# Altium PCB mchf_pro_ui.PcbDoc (part 1 of 6)
Units mm, origin at the board's own origin, x right, y up, seen from the top; angles counter-clockwise.
Board outline 200.09 x 143.79 mm, 2 copper layers (Top Layer, Bottom Layer); 329 components, 335 nets, 1276 pads, 515 vias.
Unrouted connection lines stored in the file: 91.
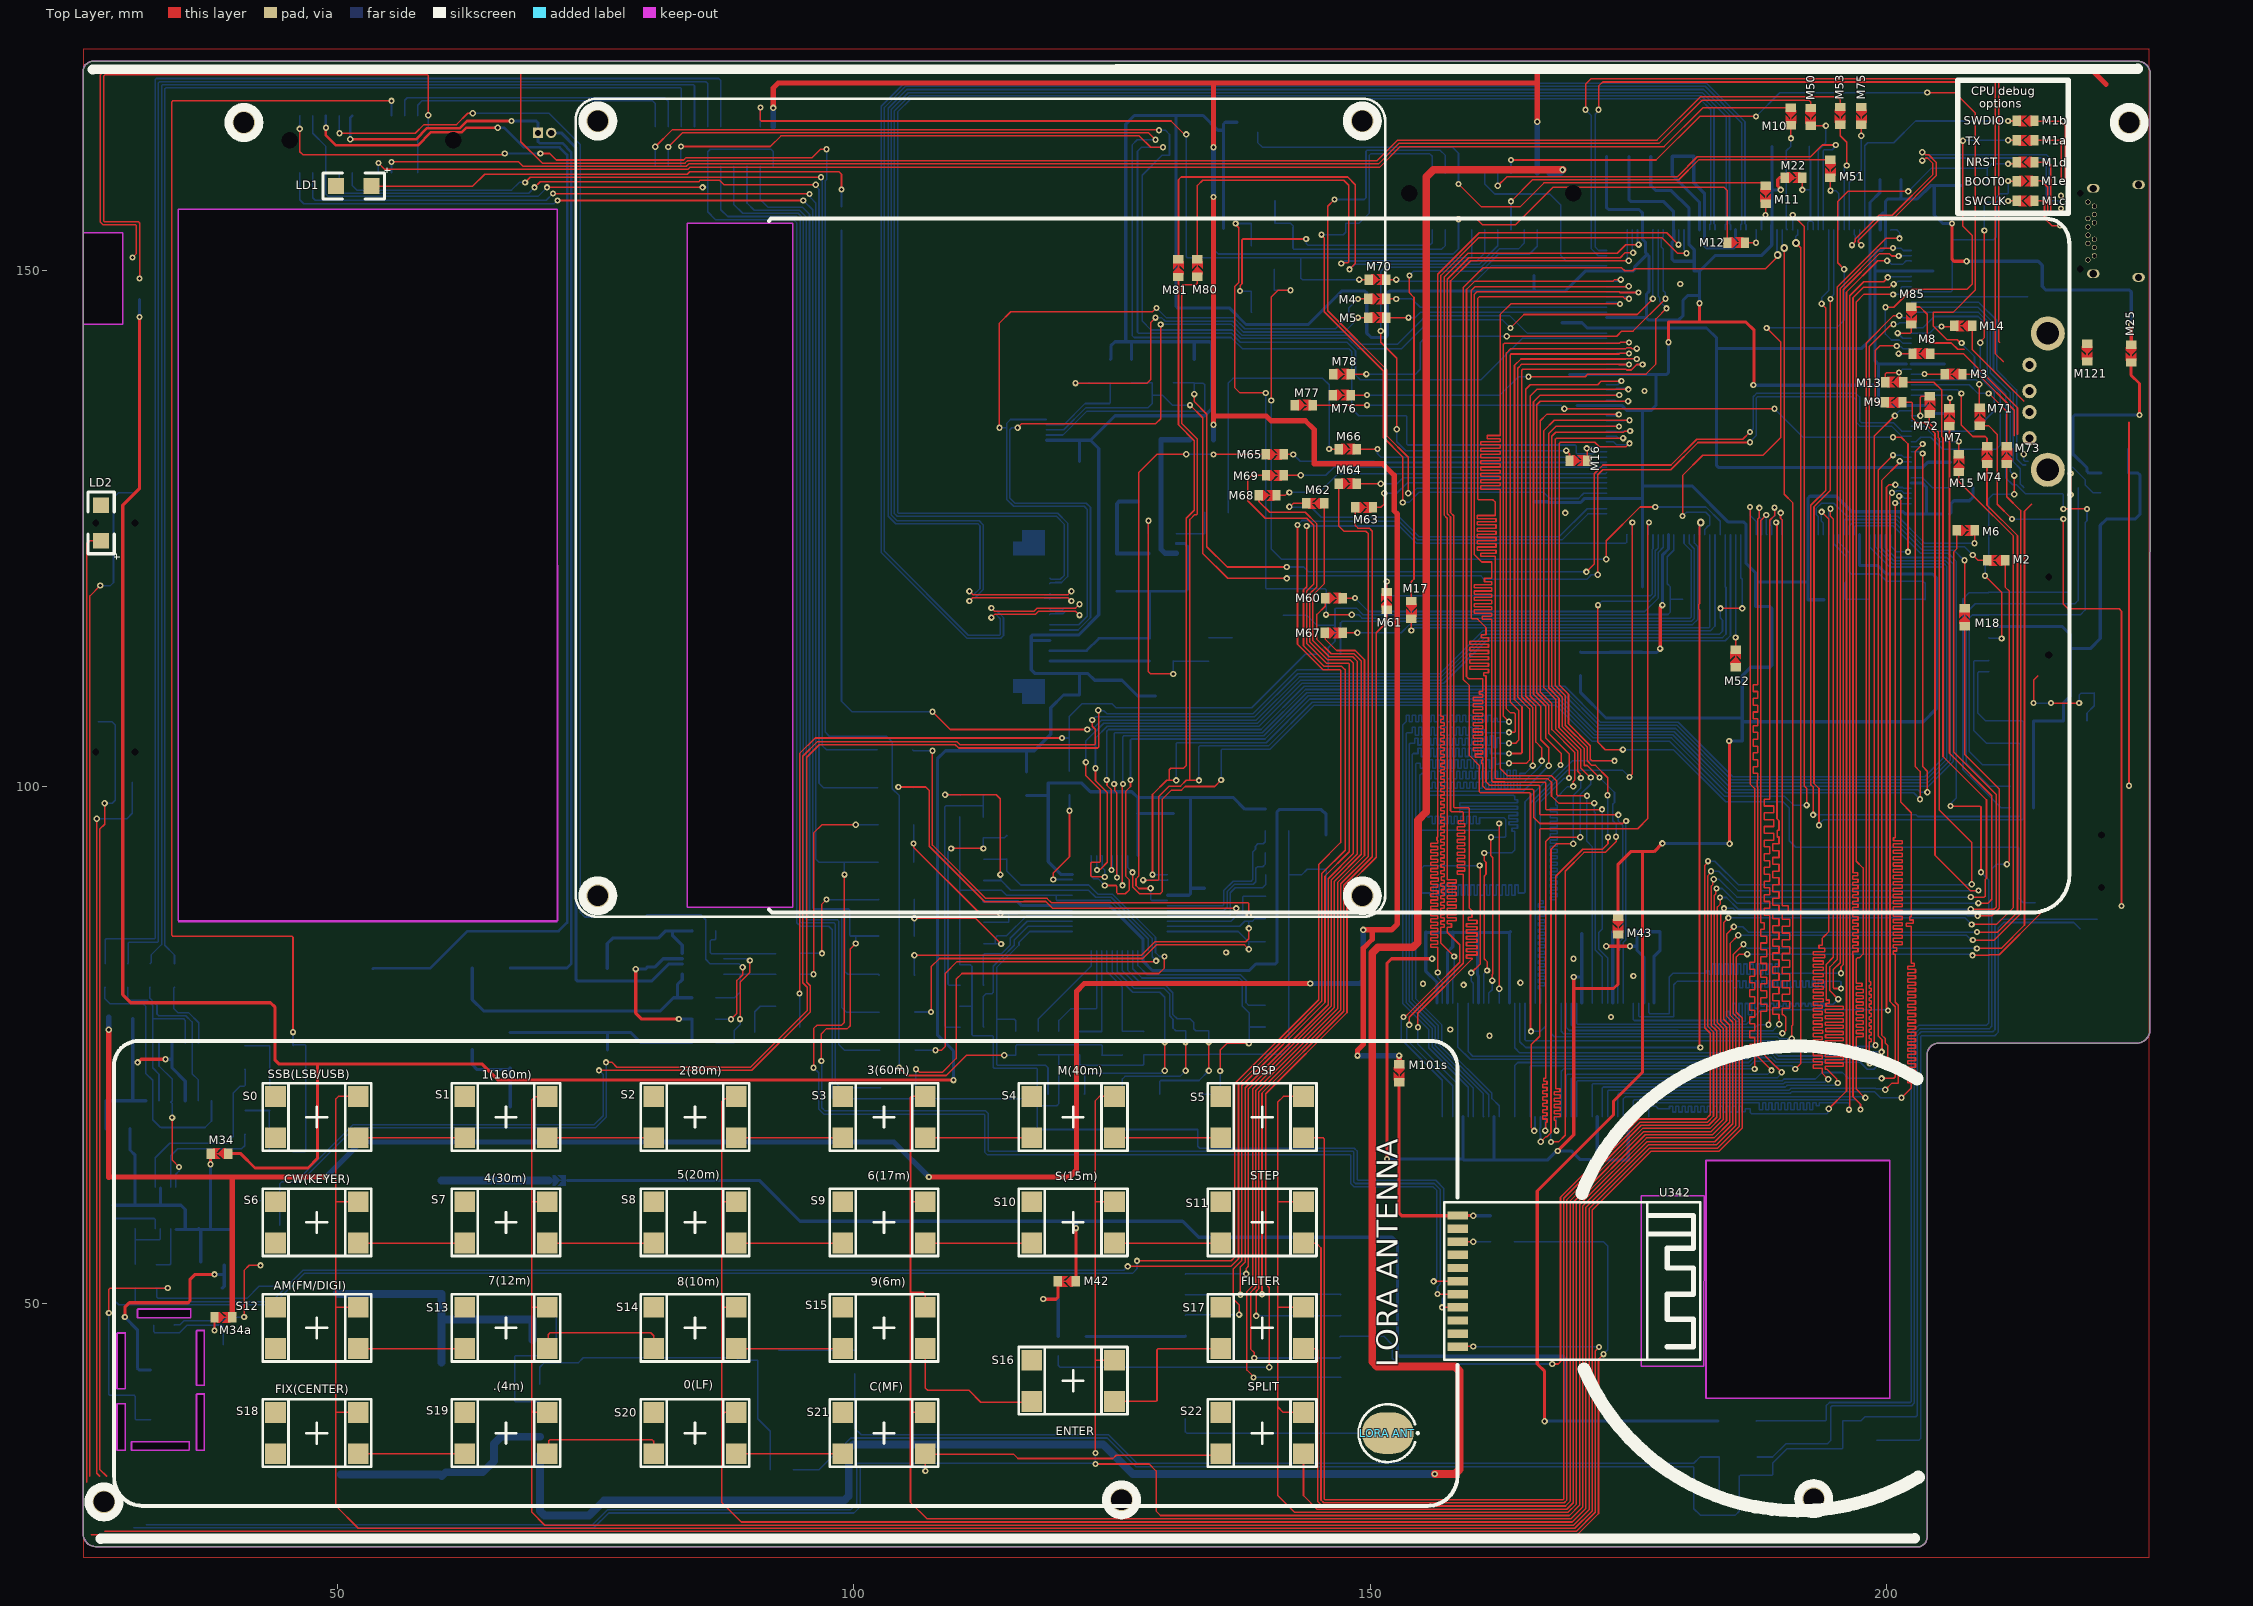
[diagram p0: Top Layer view]
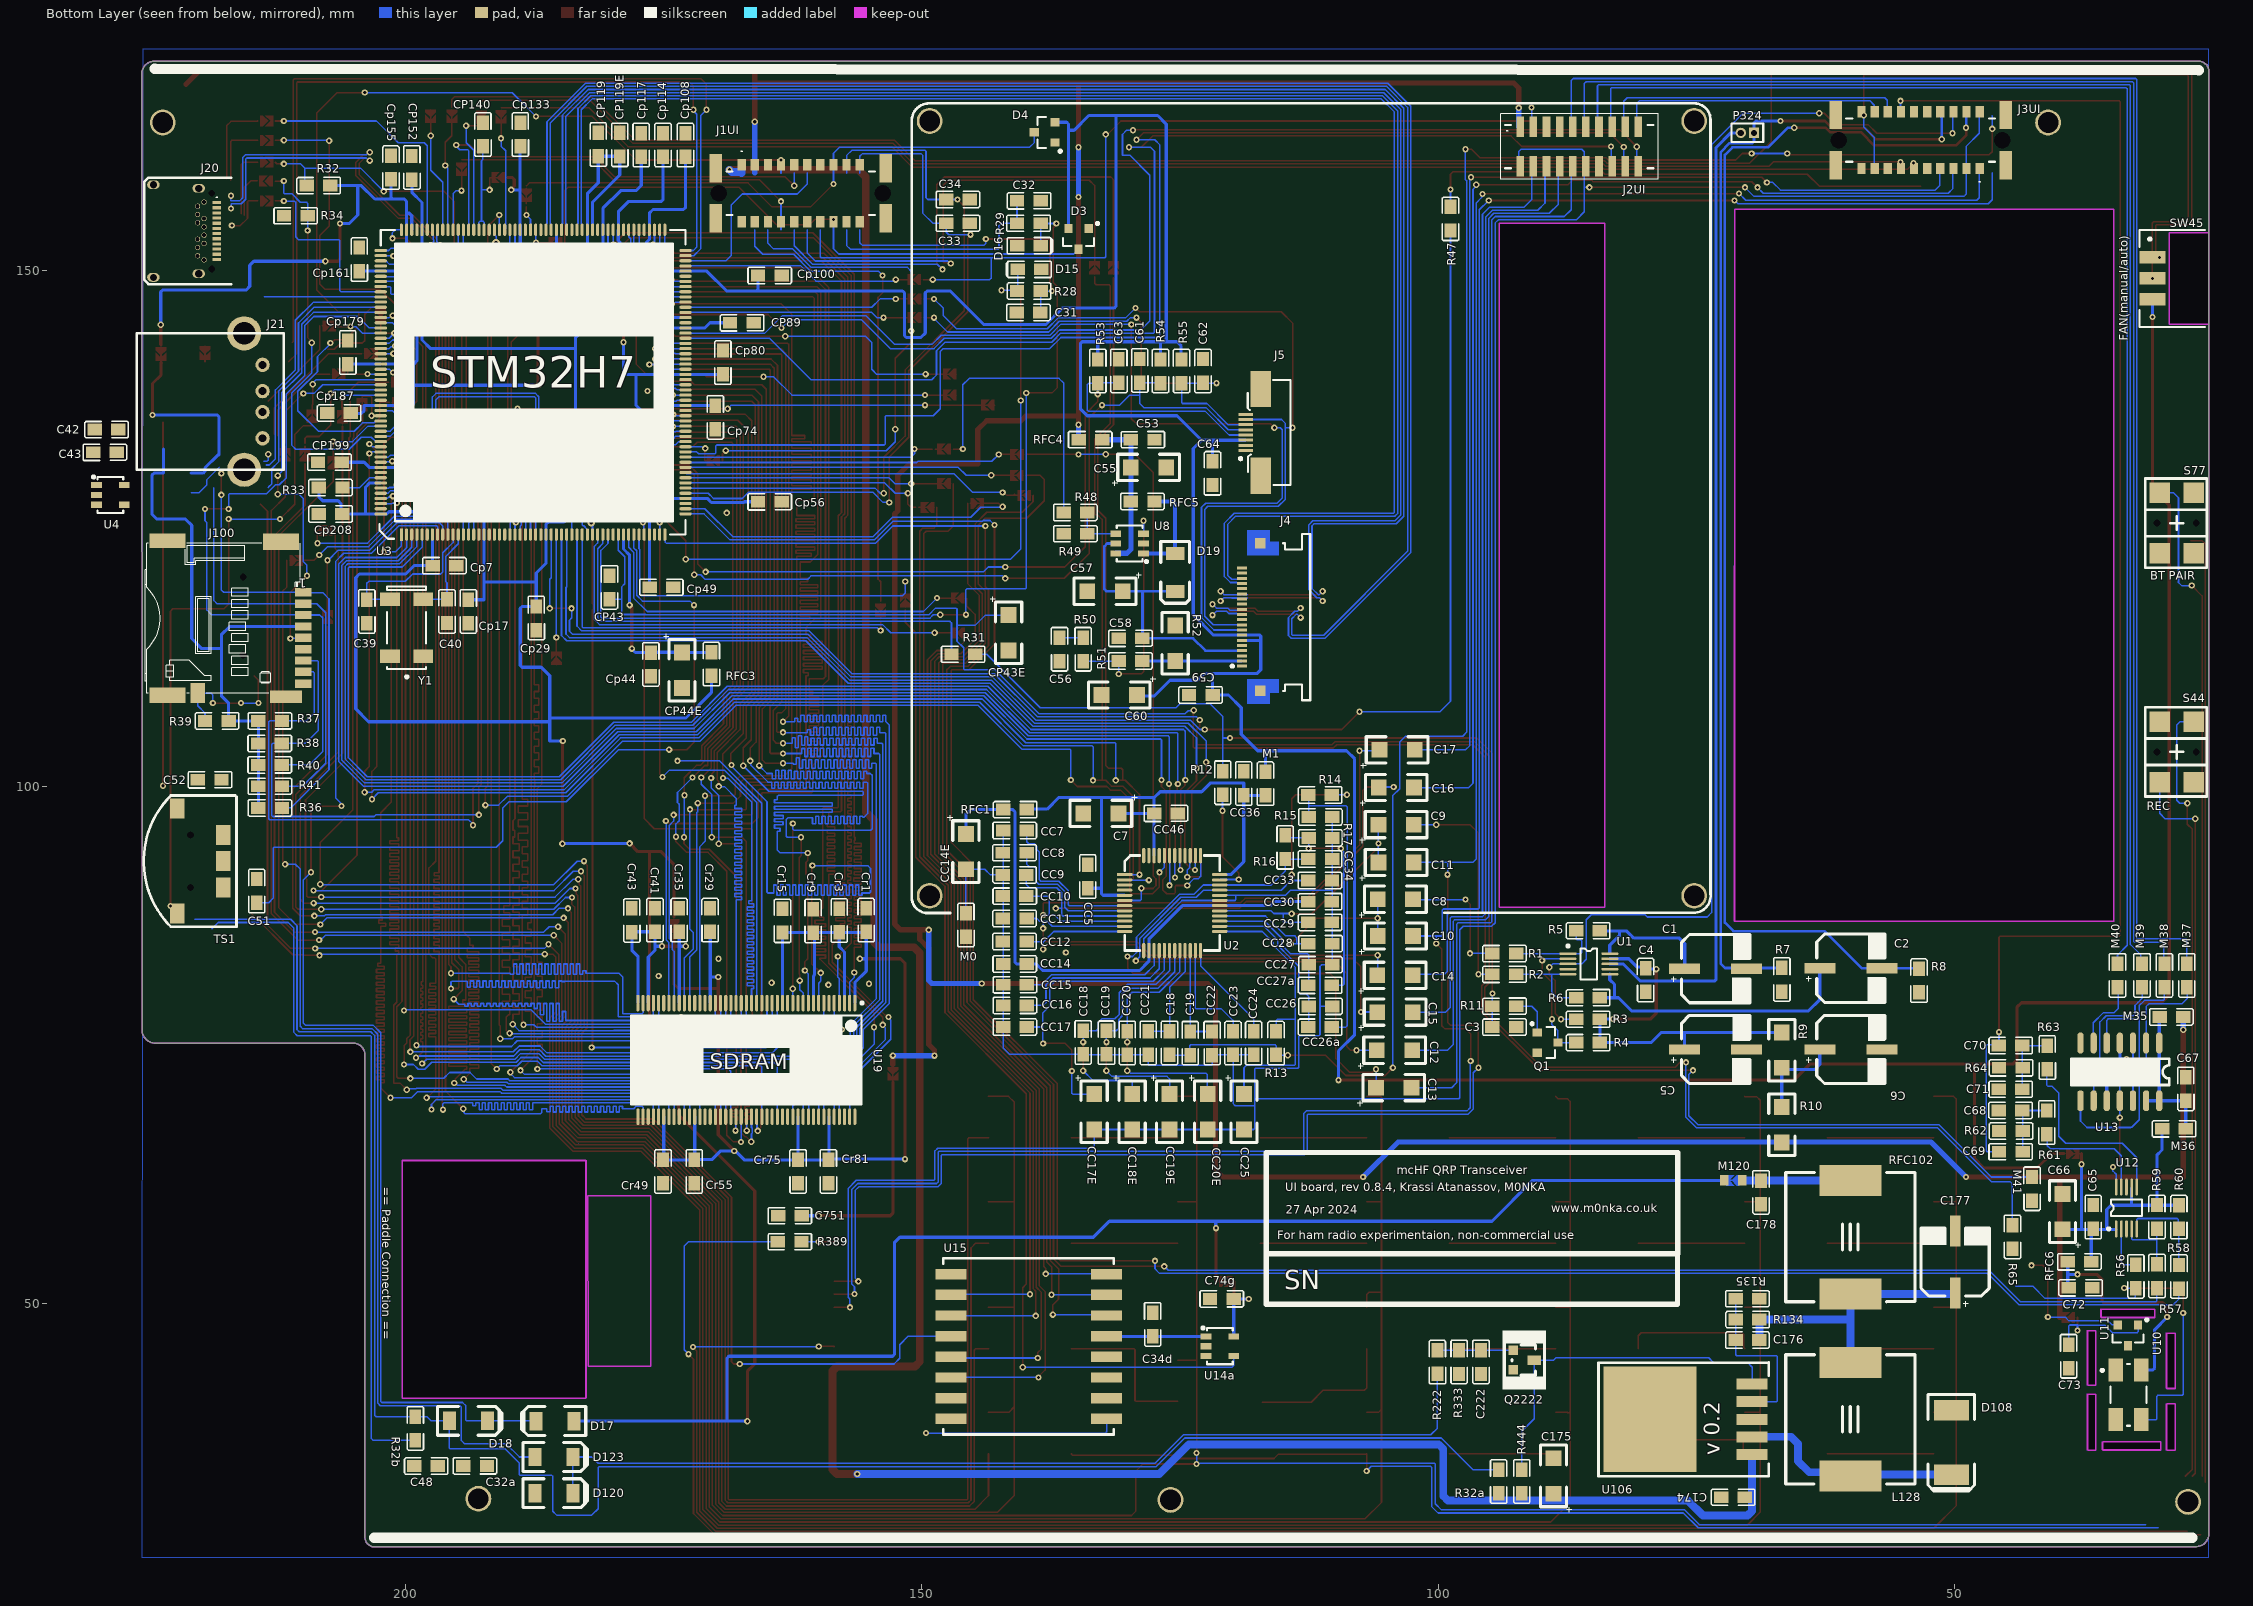
[diagram p1: Bottom Layer view, seen from below]

## Layer stack, top to bottom
Top Solder: solder mask 0.0102, Solder Resist, Dk 3.5
Top Layer: signal copper 0.0356
Dielectric 1: dielectric 0.32, FR-4, Dk 4.8
Bottom Layer: signal copper 0.0356
Bottom Solder: solder mask 0.0102, Solder Resist, Dk 3.5

## Board outline
26.612,26.451 cw(c26.608,27.659) 25.4,27.659 25.387,169.226 cw(c26.383,169.234) 26.375,170.23 224.239,170.23 224.234,170.242 cw(c224.239,168.999) 225.481,169.009 225.476,168.989 225.458,76.483 225.458,76.516 cw(c224.15,76.483) 224.182,75.175 224.15,75.175 204.979,75.175 205,75.175 ccw(c204.979,74.096) 203.9,74.118 203.9,74.096 203.9,27.35 203.89,27.35 cw(c202.9,27.396) 203.199,26.451
cut-out: 28.688,35.779 29.503,35.779 29.503,40.288 28.688,40.288
cut-out: 28.688,41.761 29.503,41.761 29.503,47.144 28.688,47.144
cut-out: 37.181,41.237 36.366,41.237 36.366,35.79 37.181,35.79
cut-out: 37.181,47.375 36.366,47.375 36.366,42.07 37.181,42.07
cut-out: 30.11,36.619 30.11,35.804 35.724,35.804 35.724,36.619
cut-out: 30.694,49.472 30.694,48.643 35.872,48.643 35.872,49.472
cut-out: 71.303,86.957 71.303,155.918 34.607,155.918 34.607,86.957
cut-out: 94.074,154.557 83.888,154.557 83.888,88.34 94.074,88.34
cut-out: 200.258,63.827 182.472,63.827 182.472,40.833 200.258,40.833

## Design rules (kind name [scope] priority, off if disabled: settings)
Clearance Clearance_2 [InComponent('U204')] p1: gap=0.127 ignorepadtopadclearanceinfootprint=FALSE except(0: Arc-Hole Track-Hole SMDPad-Hole THPad-Hole Via-Hole Fill-Hole Poly-Hole Region-Hole Text-Hole)
Clearance [All] p2: gap=0.152 ignorepadtopadclearanceinfootprint=FALSE except(0: Arc-Hole Track-Hole SMDPad-Hole THPad-Hole Via-Hole Fill-Hole Poly-Hole Region-Hole Text-Hole)
DiffPairsRouting [All] p1: maxlimit=0.61 minlimit=0.152 mostfreqgap=0.152 toplayer_minwidth=0.152 toplayer_maxwidth=0.152 toplayer_prefwidth=0.152 bottomlayer_minwidth=0.152 bottomlayer_maxwidth=0.152 bottomlayer_prefwidth=0.152 maxuncoupledlength=12.7
HoleSize [All] p1: absolutevalues=TRUE maxlimit=152.4 minlimit=0.3 maxpercent=80.000 minpercent=20.000
MatchedLengths "Schematic Matched Net Lengths_4" [InNet('OTG_HS_DP')] p1: tolerance=7.62 checknetsindiffpair=TRUE checkdiffpairvsdiffpair=FALSE checkxsignals=FALSE checkothers=FALSE
MatchedLengths "Schematic Matched Net Lengths" [InNet('OTG_HS_DM')] p2: tolerance=7.62 checknetsindiffpair=TRUE checkdiffpairvsdiffpair=FALSE checkxsignals=FALSE checkothers=FALSE
MatchedLengths "Schematic Matched Net Lengths_12" [InNetClass('FMC_D[0..31]')] p3: tolerance=2.54 checknetsindiffpair=FALSE checkdiffpairvsdiffpair=TRUE checkxsignals=TRUE checkothers=TRUE
MatchedLengths "Schematic Matched Net Lengths_3" [InNetClass('FMC_A[0..11]')] p4: tolerance=2.54 checknetsindiffpair=FALSE checkdiffpairvsdiffpair=TRUE checkxsignals=TRUE checkothers=TRUE
MatchedLengths "Schematic Matched Net Lengths_2" [InNet('USB_DFU_N')] p5: tolerance=7.62 checknetsindiffpair=TRUE checkdiffpairvsdiffpair=FALSE checkxsignals=FALSE checkothers=FALSE
MatchedLengths "Schematic Matched Net Lengths_1" [InNet('USB_DFU_P')] p6: tolerance=7.62 checknetsindiffpair=TRUE checkdiffpairvsdiffpair=FALSE checkxsignals=FALSE checkothers=FALSE
PolygonConnect PolygonConnect_4 [InComponent('C1') or InComponent('C2') or InComponent('C5')  or InComponent('C6')] p1: connectstyle=Relief reliefconductorwidth=0.508 reliefentries=4 polygonreliefangle="45 Angle" airgapwidth=0.254
PolygonConnect PolygonConnect_1 [IsVia] p2: connectstyle=Direct reliefconductorwidth=0.254 reliefentries=4 polygonreliefangle="90 Angle" airgapwidth=0.254
PolygonConnect [All] p3: connectstyle=Relief reliefconductorwidth=0.254 reliefentries=4 polygonreliefangle="90 Angle" airgapwidth=0.254
RoomDefinition "BT Audio Module" [InComponentClass('BT Audio Module')] p1: confinementstyle=ConfineIn formatcopy=TRUE lockcomponents=FALSE outline 226.586,27.851 253.287,27.851 253.287,35.052 226.586,35.052
RoomDefinition "Speaker Amp" [InComponentClass('Speaker Amp')] p2: confinementstyle=ConfineOut formatcopy=TRUE lockcomponents=FALSE outline 185.75,199.525 224.525,199.525 224.525,207.275 185.75,207.275
RoomDefinition Codec [InComponentClass('Codec')] p3: confinementstyle=ConfineIn formatcopy=TRUE lockcomponents=FALSE outline 148.676,61.211 148.676,105.905 99.578,105.905 99.578,61.211
RoomDefinition "Debug Port" [InComponentClass('Debug Port')] p4: confinementstyle=ConfineIn formatcopy=TRUE lockcomponents=FALSE outline 225.473,168.75 205.536,168.75 205.536,117.274 225.473,117.274
RoomDefinition "LORA wireless module" [InComponentClass('LORA wireless module')] p5: confinementstyle=ConfineOut formatcopy=TRUE lockcomponents=FALSE outline 156.375,199.55 185.225,199.55 185.225,207.25 156.375,207.25
RoomDefinition "LCD interface" [InComponentClass('LCD interface')] p6: confinementstyle=ConfineIn formatcopy=TRUE lockcomponents=FALSE outline 99.65,106.275 146.6,106.275 146.6,168.181 99.65,168.181
RoomDefinition "Local Oscillator" [InComponentClass('Local Oscillator')] p7: confinementstyle=ConfineIn formatcopy=TRUE lockcomponents=FALSE outline 50.425,86.6 26.679,86.6 26.679,34.35 50.425,34.35
RoomDefinition SDRAM [InComponentClass('SDRAM')] p8: confinementstyle=ConfineIn formatcopy=TRUE lockcomponents=FALSE outline 149.45,92.84 149.45,59.95 181.924,59.95 181.924,92.84
RoomDefinition CPU [InComponentClass('CPU')] p9: confinementstyle=ConfineOut formatcopy=TRUE lockcomponents=FALSE outline 156.235,173.431 165.532,173.431 165.532,199.034 156.235,199.034
RoomDefinition "RF/Audio board Interface" [InComponentClass('RF/Audio board Interface')] p10: confinementstyle=ConfineOut formatcopy=TRUE lockcomponents=FALSE outline 192.748,173.575 211.218,173.575 211.218,189.775 192.748,189.775
RoomDefinition "UI Controls" [InComponentClass('UI Controls')] p11: confinementstyle=ConfineOut formatcopy=TRUE lockcomponents=FALSE outline 166.014,173.431 192.532,173.431 192.532,189.916 166.014,189.916
RoomDefinition "CPU power and clocks" [InComponentClass('CPU power and clocks')] p12: confinementstyle=ConfineOut formatcopy=TRUE lockcomponents=FALSE outline 166.014,190.373 224.536,190.373 224.536,198.933 166.014,198.933
RoutingVias [All] p1: holewidth=0.381 width=0.762 viastyle="Through Hole" minholewidth=0.711 minwidth=1.27 maxholewidth=0.711 maxwidth=1.27
SilkToSilkClearance [All] p1: silktosilkclearance=0.127
SilkToSolderMaskClearance SilkscreenOverComponentPads [IsPad] p1: minsilkscreentomaskgap=0 clearancetoexposedcopper=TRUE
SolderMaskExpansion SolderMaskExpansion_1 [IsVia] p1: expansion=-0.381 istentingtop=FALSE
SolderMaskExpansion [All] p2: expansion=0.102 istentingtop=FALSE
Width "Schematic Width Constraint_19" [InNet('NetCP89_2')] p1: maxlimit=0.305 minlimit=0.305 preferedwidth=0.305
Width "Schematic Width Constraint_7" [InNet('UI_3V_MCU')] p2: maxlimit=0.305 minlimit=0.305 preferedwidth=0.305
Width "Schematic Width Constraint_11" [InNet('VCC_5V_RF')] p3: maxlimit=0.508 minlimit=0.508 preferedwidth=0.508
Width "Schematic Width Constraint_5" [InNet('NetC751_2')] p4: maxlimit=0.305 minlimit=0.305 preferedwidth=0.305
Width "Schematic Width Constraint_2" [InNet('NetC74g_2')] p5: maxlimit=0.305 minlimit=0.305 preferedwidth=0.305
Width "Schematic Width Constraint_36" [InNet('NetP324_2')] p6: maxlimit=0.305 minlimit=0.305 preferedwidth=0.305
Width "Schematic Width Constraint_35" [InNet('NetC1_1')] p7: maxlimit=0.305 minlimit=0.305 preferedwidth=0.305
Width "Schematic Width Constraint_34" [InNet('NetC4_2')] p8: maxlimit=0.305 minlimit=0.305 preferedwidth=0.305
Width "Schematic Width Constraint_33" [InNet('NetC2_1')] p9: maxlimit=0.305 minlimit=0.305 preferedwidth=0.305
Width "Schematic Width Constraint_32" [InNet('NetC6_1')] p10: maxlimit=0.305 minlimit=0.305 preferedwidth=0.305
Width "Schematic Width Constraint_31" [InNet('PHONES_R')] p11: maxlimit=0.254 minlimit=0.254 preferedwidth=0.254
Width "Schematic Width Constraint_20" [InNet('PHONES_L')] p12: maxlimit=0.254 minlimit=0.254 preferedwidth=0.254
Width "Schematic Width Constraint_14" [InNet('NetD108_2')] p13: maxlimit=0.762 minlimit=0.762 preferedwidth=0.762
Width "Schematic Width Constraint_8" [InNet('VCC_20V')] p14: maxlimit=0.762 minlimit=0.762 preferedwidth=0.762
Width "Schematic Width Constraint_6" [InNet('NetC176_2')] p15: maxlimit=0.762 minlimit=0.762 preferedwidth=0.762
Width "Schematic Width Constraint_4" [InNet('NetC178_1')] p16: maxlimit=0.762 minlimit=0.762 preferedwidth=0.762
Width "Schematic Width Constraint_46" [InNet('NetC42_2')] p17: maxlimit=0.305 minlimit=0.305 preferedwidth=0.305
Width "Schematic Width Constraint_37" [InNet('NetC34d_2')] p18: maxlimit=0.305 minlimit=0.305 preferedwidth=0.305
Width "Schematic Width Constraint_30" [InNet('UI_3V_LO')] p19: maxlimit=0.305 minlimit=0.305 preferedwidth=0.305
Width "Schematic Width Constraint_27" [InNet('NetC67_2')] p20: maxlimit=0.305 minlimit=0.305 preferedwidth=0.305
Width "Schematic Width Constraint_23" [InNet('NetCC14_2')] p21: maxlimit=0.305 minlimit=0.305 preferedwidth=0.305
Width "Schematic Width Constraint_21" [InNet('VDDA')] p22: maxlimit=0.305 minlimit=0.305 preferedwidth=0.305
Width "Schematic Width Constraint_17" [InNet('UI_3V_SDRAM')] p23: maxlimit=0.305 minlimit=0.305 preferedwidth=0.305
Width "Schematic Width Constraint_15" [InNet('GND')] p24: maxlimit=0.508 minlimit=0.508 preferedwidth=0.508
Width "Schematic Width Constraint_3" [InNet('SD_POWER')] p25: maxlimit=0.305 minlimit=0.305 preferedwidth=0.305
Width "Schematic Width Constraint_1" [InNet('NetC7_1')] p26: maxlimit=0.305 minlimit=0.305 preferedwidth=0.305
Width "Schematic Width Constraint" [InNet('NetC72_2')] p27: maxlimit=0.305 minlimit=0.305 preferedwidth=0.305
Width "Schematic Width Constraint_18" [InNet('NetCP119_1')] p28: maxlimit=0.305 minlimit=0.305 preferedwidth=0.305
Width "Schematic Width Constraint_10" [InNet('LCD_BL_A')] p29: maxlimit=0.254 minlimit=0.254 preferedwidth=0.254
Width "Schematic Width Constraint_9" [InNet('LCD_BL_K')] p30: maxlimit=0.254 minlimit=0.254 preferedwidth=0.254
Width "Schematic Width Constraint_13" [InNet('NetD19_1')] p31: maxlimit=0.381 minlimit=0.381 preferedwidth=0.381
Width "Schematic Width Constraint_12" [InNet('LCD_VDD')] p32: maxlimit=0.508 minlimit=0.508 preferedwidth=0.508
Width [All] p33: maxlimit=0.152 minlimit=0.152 preferedwidth=0.152
26 further rules are at their usual default settings.

## Classes and differential pairs
component class "BT Audio Module": C751 LD2 M101s R389 U342
component class "Speaker Amp": C1 C2 C3 C4 C5 C6 J3UI P324 Q1 R1 R2 R3 R4 R5 R6 R7 R8 R9 R10 R11 SW45 U1
component class "LORA wireless module": C34d C74g "Lora Ant" M42 U14a U15
component class "Debug Port": C42 C43 J20 J21 J100 M1a M1b M1c M1d M1e M25 M121 R36 R37 R38 R39 R40 R41 U4
component class Codec: C7 C8 C9 C10 C11 C12 C13 C14 C15 C16 C17 C18 C19 CC5 CC7 CC8 CC9 CC10 CC11 CC12 CC14 CC14E CC15 CC16 CC17 CC17E CC18 CC18E CC19 CC19E CC20 CC20E CC21 CC22 CC23 CC24 CC25 CC26 CC26a CC27 CC27a CC28 CC29 CC30 CC33 CC34 CC36 CC46 M0 M1 R12 R13 R14 R15 R16 R17 RFC1 U2
component class "Local Oscillator": C65 C66 C67 C68 C69 C70 C71 C72 C73 J2UI M34 M34a M35 M36 M37 M38 M39 M40 M41 R56 R57 R58 R59 R60 R61 R62 R63 R64 R65 RFC6 U10 U11 U12 U13
component class "CPU Power and Clocks": C32a C39 C40 C174 C175 C176 C177 C178 C222 Cp7 Cp17 Cp29 CP43 CP43E Cp44 CP44E Cp49 Cp56 Cp74 Cp80 CP89 Cp100 Cp108 Cp114 Cp117 CP119 CP119E Cp133 CP140 CP152 Cp155 Cp161 Cp179 Cp187 CP199 Cp208 D17 D18 D108 D120 D123 L128 M22 M120 Q2222 R32 R32a R32b R33 R34 R134 R135 R222 R333 R444 RFC3 RFC102 U106 Y1
net class FMC_D[0..31]: FMC_D0 FMC_D1 FMC_D2 FMC_D3 FMC_D4 FMC_D5 FMC_D6 FMC_D7 FMC_D8 FMC_D9 FMC_D10 FMC_D11 FMC_D12 FMC_D13 FMC_D14 FMC_D15 FMC_D16 FMC_D17 FMC_D18 FMC_D19 FMC_D20 FMC_D21 FMC_D22 FMC_D23 FMC_D24 FMC_D25 FMC_D26 FMC_D27 FMC_D28 FMC_D29 FMC_D30 FMC_D31
net class FMC_A[0..11]: FMC_A0 FMC_A1 FMC_A2 FMC_A3 FMC_A4 FMC_A5 FMC_A6 FMC_A7 FMC_A8 FMC_A9 FMC_A10 FMC_A11
component class SDRAM: Cr1 Cr3 Cr9 Cr15 Cr29 Cr35 Cr41 Cr43 Cr49 Cr55 Cr75 Cr81 M43 U19
component class "RF/Audio board Interface": C31 C32 C33 C34 D3 D4 D15 D16 J1UI R28 R29
component class "UI Controls": C48 C51 C52 C252 C255 C258 C267 C268 C269 C270 C271 C272 LD1 R47 S0 S1 S2 S3 S4 S5 S6 S7 S8 S9 S10 S11 S12 S13 S14 S15 S16 S17 S18 S19 S20 S21 S22 S44 S77 TS1
component class CPU: M2 M3 M4 M5 M6 M7 M8 M9 M10 M11 M12 M13 M14 M15 M16 M17 M18 M50 M51 M52 M53 M60 M61 M62 M63 M64 M65 M66 M67 M68 M69 M70 M71 M72 M73 M74 M75 M76 M77 M78 M80 M81 M85 R31 R_15 U3
component class "LCD interface": C53 C55 C56 C57 C58 C59 C60 C61 C62 C63 C64 D19 J4 J5 L4 L5 R48 R49 R50 R51 R52 R53 R54 R55 RFC4 RFC5 U8
differential pair DSI_D1: +DSI_D1_P -DSI_D1_N
differential pair DSI_D0: +DSI_D0_P -DSI_D0_N
differential pair DSI_CLK: +DSI_CLK_P -DSI_CLK_N
differential pair USB_DFU: +USB_DFU_P -USB_DFU_N

## Components (designator, comment, footprint, x,y, rotation, side; value= is the part's Value field where it differs from the comment)
C1 "100uF" CAP_ALUM_Pro 73.125,82.4 r180 bottom locked
C2 "100uF" CAP_ALUM_Pro 60.05,82.433 r180 bottom locked
C3 "100nF" 0805 92.428,76.743 r0 bottom
C4 "100nF" 0805 79.9,80.125 r90 bottom
C5 "220uF" CAP_ALUM_Pro 73.129,74.575 r180 bottom locked
C6 "220uF" CAP_ALUM_Pro 60.05,74.575 r180 bottom locked
C7 "10uF" 1206_Elec_Cap 130.903,97.427 r0 bottom
C8 "1uF" 1206_Elec_Cap 105.871,89.111 r180 bottom
C9 "1uF" 1206_Elec_Cap 105.796,96.325 r180 bottom
C10 "1uF" 1206_Elec_Cap 105.871,85.552 r180 bottom
C11 "1uF" 1206_Elec_Cap 105.796,92.67 r180 bottom
C12 "1uF" 1206_Elec_Cap 105.951,74.494 r180 bottom
C13 "1uF" 1206_Elec_Cap 106.026,70.869 r180 bottom
C14 "1uF" 1206_Elec_Cap 105.902,81.744 r180 bottom
C15 "1uF" 1206_Elec_Cap 105.902,78.178 r180 bottom
C16 "1uF" 1206_Elec_Cap 105.776,99.919 r180 bottom
C17 "1uF" 1206_Elec_Cap 105.701,103.569 r180 bottom
C18 "2.2uF" 0805 125.998,76.356 r270 bottom value=100nF
C19 "2.2uF" 0805 123.998,76.332 r270 bottom value=100nF
C31 "100nF" 0805 140.804,145.909 r180 bottom
C32 "100nF" 0805 138.453,156.731 r0 bottom
C32a "100nF" 0805 194.372,34.256 r180 bottom
C33 "100nF" 0805 147.622,154.544 r180 bottom
C34 "100nF" 0805 147.622,156.844 r180 bottom
C34d "100nF" 0805 127.631,49.122 r270 bottom
C39 "1.5pF" 0805 203.702,118.129 r270 bottom
C40 "1.5pF" 0805 195.933,115.831 r90 bottom
C42 "2.2uF" 0805 227.742,134.581 r0 bottom value=1礔
C43 "100nF" 0805 230.208,132.369 r180 bottom
C48 "100nF" 0805 199.006,39.033 r270 bottom
C51 "100nF" 0805 214.344,88.763 r90 bottom
C52 "100nF" 0805 217.739,100.683 r0 bottom
C53 "100nF" 0805 127.428,133.606 r0 bottom
C55 "10uF" 1206_Elec_Cap 129.758,130.909 r180 bottom
C56 "2.2uF" 0805 136.642,114.467 r270 bottom
C57 "1uF" 1206_Elec_Cap 130.505,118.931 r0 bottom
C58 "100nF" 0805 130.922,114.365 r180 bottom
C59 "100nF" 0805 124.133,108.881 r180 bottom value=100pF
C60 "10uF" 1206_Elec_Cap 129.124,108.892 r0 bottom
C61 "18pF" 0805 128.881,141.433 r270 bottom
C62 "18pF" 0805 122.744,139.103 r90 bottom
C63 "18pF" 0805 130.906,141.4 r270 bottom
C64 "100nF" 0805 121.819,129.192 r90 bottom value=100pF
C65 "100nF" 0805 36.573,57.205 r90 bottom
C66 "10uF" 1206_Elec_Cap 39.544,57.136 r90 bottom
C67 "100nF" 0805 27.628,71.919 r270 bottom
C68 "1nF" 0805 43.428,68.681 r0 bottom
C69 "390" 0805 45.724,64.661 r180 bottom
C70 "390" 0805 43.413,74.956 r0 bottom
C71 "1nF" 0805 43.413,70.731 r0 bottom
C72 "100nF" 0805 36.649,51.51 r0 bottom
C73 "100nF" 0805 38.962,46.031 r270 bottom
C74g "2.2uF" 0805 122.097,50.419 r180 bottom value=1礔
C174 "100nF" 0805 70.278,31.231 r0 bottom
C175 "22uF" 1206_Elec_Cap 88.825,31.55 r90 bottom
C176 "DNI" 0805 71.203,46.432 r180 bottom
C177 "220uF" CAP_ALUM_Pro 49.946,54.007 r90 bottom locked
C178 "100nF" 0805 68.742,61.898 r270 bottom
C222 "100nF" 0805 95.849,45.465 r270 bottom
C751 "100nF" 0805 163.908,58.469 r180 bottom
CC5 "100nF" 0805 133.9,90.151 r90 bottom
CC7 "1nF" 0805 142.131,95.753 r180 bottom
CC8 "1nF" 0805 142.142,93.606 r180 bottom
CC9 "1nF" 0805 139.831,91.474 r0 bottom
CC10 "1nF" 0805 139.821,89.423 r0 bottom
CC11 "1nF" 0805 142.142,87.243 r180 bottom
CC12 "1nF" 0805 142.142,85.005 r180 bottom
CC14 "100nF" 0805 142.131,82.84 r180 bottom
CC14E "10uF" 1206_Elec_Cap 145.71,95.459 r270 bottom
CC15 "2.2uF" 0805 142.113,80.824 r180 bottom value=100nF
CC16 "2.2uF" 0805 142.113,78.833 r180 bottom value=100nF
CC17 "100nF" 0805 142.12,76.738 r180 bottom
CC17E "10uF" 1206_Elec_Cap 133.297,70.275 r270 bottom
CC18 "100nF" 0805 134.359,76.403 r270 bottom
CC18E "10uF" 1206_Elec_Cap 129.613,70.275 r270 bottom
CC19 "100nF" 0805 132.098,74.071 r90 bottom
CC19E "47uF" 1206_Elec_Cap 125.998,70.275 r270 bottom
CC20 "100nF" 0805 130.092,76.356 r270 bottom
CC20E "47uF" 1206_Elec_Cap 122.31,70.275 r270 bottom
CC21 "1nF" 0805 128.064,76.356 r270 bottom
CC22 "1nF" 0805 121.874,76.332 r270 bottom
CC23 "1nF" 0805 119.839,74.026 r90 bottom
CC24 "1nF" 0805 117.843,74.025 r90 bottom
CC25 "47uF" 1206_Elec_Cap 118.789,70.275 r270 bottom
CC26 "1nF" 0805 112.552,78.735 r180 bottom
CC26a "1nF" 0805 110.262,76.743 r0 bottom
CC27 "1nF" 0805 112.548,82.774 r180 bottom
CC27a "1nF" 0805 110.262,80.789 r0 bottom
CC28 "1nF" 0805 110.242,84.816 r0 bottom
CC29 "1nF" 0805 110.262,86.883 r0 bottom
CC30 "100nF" 0805 110.262,88.885 r0 bottom
CC33 "1nF" 0805 112.573,90.921 r180 bottom
CC34 "1nF" 0805 112.57,92.992 r180 bottom
CC36 "100nF" 0805 118.8,99.178 r90 bottom
CC46 "100nF" 0805 127.492,97.422 r180 bottom
Cp7 "100nF" 0805 197.349,121.397 r180 bottom (schematic designator CP7)
Cp17 "100nF" 0805 193.878,118.129 r270 bottom (schematic designator CP17)
Cp29 "100nF" 0805 187.298,117.474 r270 bottom (schematic designator CP29)
CP43 "100nF" 0805 180.214,120.46 r270 bottom value=10nF
CP43E "1uF" 1206_Elec_Cap 141.577,116.638 r270 bottom value=10uF
Cp44 "100nF" 0805 176.206,112.997 r270 bottom (schematic designator CP44)
CP44E "1uF" 1206_Elec_Cap 173.197,113.018 r270 bottom
Cp49 "100nF" 0805 176.348,119.306 r180 bottom (schematic designator CP49)
Cp56 "100nF" 0805 165.85,127.579 r180 bottom (schematic designator CP56)
Cp74 "100nF" 0805 169.967,136.914 r270 bottom (schematic designator CP74)
Cp80 "100nF" 0805 169.225,139.922 r90 bottom (schematic designator CP80)
CP89 "2.2uF" 0805 166.233,144.92 r0 bottom value=100nF
Cp100 "100nF" 0805 165.85,149.481 r180 bottom (schematic designator CP100)
Cp108 "100nF" 0805 172.843,160.968 r90 bottom (schematic designator CP108)
Cp114 "100nF" 0805 175.014,160.968 r90 bottom (schematic designator CP114)
Cp117 "100nF" 0805 177.13,160.968 r90 bottom (schematic designator CP117)
CP119 "100nF" 0805 181.281,161.012 r90 bottom
CP119E "2.2uF" 0805 179.202,160.99 r90 bottom value=100nF
Cp133 "100nF" 0805 188.829,161.987 r90 bottom (schematic designator CP133)
CP140 "2.2uF" 0805 192.452,161.987 r90 bottom value=1礔
CP152 "2.2uF" 0805 199.344,161.082 r270 bottom value=100nF
Cp155 "100nF" 0805 201.356,158.772 r90 bottom (schematic designator CP155)
Cp161 "100nF" 0805 204.416,149.895 r90 bottom (schematic designator CP161)
Cp179 "100nF" 0805 205.531,140.893 r90 bottom (schematic designator CP179)
Cp187 "100nF" 0805 205.228,136.181 r0 bottom (schematic designator CP187)
CP199 "2.2uF" 0805 208.445,131.414 r180 bottom value=10nF
Cp208 "100nF" 0805 206.049,126.414 r0 bottom (schematic designator CP208)
Cr1 "100nF" 0805 155.348,85.93 r90 bottom (schematic designator CR1)
Cr3 "100nF" 0805 157.956,85.894 r90 bottom (schematic designator CR3)
Cr9 "100nF" 0805 160.485,85.85 r90 bottom (schematic designator CR9)
Cr15 "100nF" 0805 163.456,85.872 r90 bottom (schematic designator CR15)
Cr29 "100nF" 0805 170.456,85.93 r90 bottom (schematic designator CR29)
Cr35 "100nF" 0805 173.456,85.93 r90 bottom (schematic designator CR35)
Cr41 "100nF" 0805 175.801,85.952 r90 bottom (schematic designator CR41)
Cr43 "100nF" 0805 178.036,85.915 r90 bottom (schematic designator CR43)
Cr49 "100nF" 0805 175.027,63.909 r270 bottom (schematic designator CR49)
Cr55 "100nF" 0805 172.012,63.909 r270 bottom (schematic designator CR55)
Cr75 "100nF" 0805 161.956,63.909 r270 bottom (schematic designator CR75)
Cr81 "100nF" 0805 159.025,63.909 r270 bottom (schematic designator CR81)
D3 "BAV99" SOT-23 134.8,153.034 r0 bottom
D4 "BAV99" SOT-23 138.075,163.35 r90 bottom
D15 "4.7V" 0805P 138.375,150.093 r0 bottom
D16 "4.7V" 0805P 140.758,152.369 r180 bottom
D17 "PMEG6010CEH" SOD87 183.638,38.606 r0 bottom
D18 "PMEG6010CEH" SOD87 195.712,38.619 r180 bottom
D19 "PMEG6010CEH" SOD87 125.452,122.605 r270 bottom
D108 "SS34" DO214 50.319,39.666 r270 bottom locked
D120 "PMEG6010CEH" SOD87 187.437,31.619 r180 bottom
D123 "PMEG6010CEH" SOD87 187.437,35.119 r180 bottom
J1UI "1373866" 1373866 161.697,157.456 r180 bottom locked
J2UI "1373866" YuanQi4mm 86.33,161.975 r180 bottom locked
J3UI "1373866" 1373866 53.29,162.6 r0 bottom locked
J4 "LCD-20pin FPC" MOLX-52746-2071 118.051,116.425 r90 bottom locked
J5 "FH19C-6S-05SH" MOLX-501461-0891 117.85,134.3 r90 bottom locked
J20 "219320-0001" USBC_24P 218.716,153.795 r270 bottom locked
J21 "USB_OUT" USB_OUT_A 226,130.66 r180 bottom locked
J100 "PJS008-2003" PJS008-2003-1 225.45,116.3 r0 bottom locked
L128 "47uH" BIG_IND 60.094,38.766 r90 bottom locked
LD1 "LTST-C150GKT" 1206_Elec_Cap 53.322,158.156 r180 top locked
LD2 "LTST-C150GKT" 1206_Elec_Cap 27.131,123.803 r90 top locked
"LORA ANT" "TP" lora_ant_pad 151.658,37.425 r0 top locked
M0 "0" 0805 145.699,85.468 r90 bottom
M1 "0" 0805 116.698,99.142 r90 bottom
M1a "0" SB_0603_NO 213.42,162.58 r0 top net-tie value=1K
M1b "0" SB_0603_NO 213.42,164.45 r0 top net-tie value=1K
M1c "0" SB_0603_NO 213.42,156.707 r0 top net-tie value=1K
M1d "0" SB_0603_NO 213.42,160.458 r0 top net-tie value=1K
M1e "0" SB_0603_NO 213.42,158.63 r180 top net-tie value=1K
M2 "0" SB_0603 210.574,121.925 r0 top net-tie value=1K
M3 "0" SB_0603 206.448,139.948 r0 top net-tie value=1K
M4 "0" SB_0603 150.655,147.238 r180 top net-tie value=1K
M5 "0" SB_0603 150.655,145.414 r180 top net-tie value=1K
M6 "0" SB_0603 207.625,124.825 r180 top net-tie value=1K
M7 "0" SB_0603 206.049,135.772 r270 top net-tie value=1K
M8 "0" SB_0603 203.322,141.925 r0 top net-tie value=1K
M9 "0" SB_0603 200.64,137.2 r0 top net-tie value=1K
M10 "0" SB_0603 190.698,164.884 r90 top net-tie value=1K
M11 "0" SB_0603 188.25,157.307 r90 top net-tie value=1K
M12 "0" SB_0603 185.399,152.663 r180 top net-tie value=1K
M13 "0" SB_0603 200.706,139.168 r0 top net-tie value=1K
M14 "0" SB_0603 207.382,144.618 r0 top net-tie value=1K
M15 "0" SB_0603 206.956,131.327 r270 top net-tie value=1K
M16 "0" SB_0603 170.125,131.563 r180 top net-tie value=1K
M17 "0" SB_0603 153.959,117.122 r90 top net-tie value=1K
M18 "0" SB_0603 207.523,116.407 r270 top net-tie value=1K
M22 "0" SB_0603 190.952,158.965 r180 top net-tie value=1K
M25 "0" SB_0603 223.62,141.925 r90 top net-tie value=1K
M34 "0" SB_0603 38.582,64.485 r0 top net-tie value=1K
M34a "0" SB_0603 38.957,48.643 r180 top net-tie value=1K
M35 "0" 0805 30.173,77.713 r180 bottom
M36 "DNI" 0805 27.606,66.898 r0 bottom
M37 "0" 0805 27.533,82.894 r270 bottom
M38 "0" 0805 29.701,82.894 r270 bottom
M39 "0" 0805 31.869,82.894 r270 bottom
M40 "0" 0805 34.24,82.894 r270 bottom
M41 "0" 0805 42.506,62.247 r270 bottom
M42 "0" SB_0603 120.6,52.125 r0 top net-tie value=1K
M43 "0" SB_0603 173.974,86.553 r90 top net-tie value=1K
M50 "0" SB_0603 192.6,164.85 r90 top net-tie value=1K
M51 "0" SB_0603 194.523,159.822 r90 top net-tie value=1K
M52 "0" SB_0603 185.349,112.424 r270 top net-tie value=1K
M53 "0" SB_0603 195.472,164.945 r90 top net-tie value=1K
M60 "0" SB_0603 146.475,118.25 r180 top net-tie value=1K
M61 "0" SB_0603 151.575,117.996 r270 top net-tie value=1K
M62 "0" SB_0603 144.656,127.425 r0 top net-tie value=1K
M63 "0" SB_0603 149.393,127.05 r180 top net-tie value=1K
M64 "0" SB_0603 147.799,129.333 r180 top net-tie value=1K
M65 "0" SB_0603 140.732,132.173 r180 top net-tie value=1K
M66 "0" SB_0603 147.799,132.691 r180 top net-tie value=1K
M67 "0" SB_0603 146.442,114.904 r180 top net-tie value=1K
M68 "0" SB_0603 140.043,128.2 r180 top net-tie value=1K
M69 "0" SB_0603 140.742,130.15 r180 top net-tie value=1K
M70 "0" SB_0603 150.681,149.092 r180 top net-tie value=1K
M71 "0" SB_0603 208.987,135.823 r270 top net-tie value=1K
M72 "0" SB_0603 204.153,136.946 r270 top net-tie value=1K
M73 "0" SB_0603 211.6,132.104 r270 top net-tie value=1K
M74 "0" SB_0603 209.682,132.104 r270 top net-tie value=1K
M75 "0" SB_0603 197.513,164.945 r90 top net-tie value=1K
M76 "0" SB_0603 147.225,137.914 r180 top net-tie value=1K
M77 "0" SB_0603 143.543,136.945 r180 top net-tie value=1K
M78 "0" SB_0603 147.25,139.95 r180 top net-tie value=1K
M80 "0" SB_0603 133.25,150.225 r270 top net-tie value=1K
M81 "0" SB_0603 131.417,150.2 r270 top net-tie value=1K
M85 "0" SB_0603 202.354,145.609 r90 top net-tie value=1K
M101s "0" SB_0603 152.775,72.268 r90 top net-tie value=1K
M120 "0" SB_0603 71.425,61.898 r180 bottom net-tie value=1K
M121 "0" SB_0603 219.361,142.02 r90 top net-tie value=1K
P324 "MHDR1X2" MHDR1X2 69.421,163.297 r0 bottom
Q1 "IRLML6244TRPBF" SOT-23 89.4,75.239 r270 bottom
Q2222 "IRLML6244TRPBF" SOT-23-Pro 92.734,45.465 r270 bottom
R1 "22K" 0805 92.428,83.856 r0 bottom
R2 "22K" 0805 92.428,81.856 r0 bottom
R3 "100k" 0805 84.317,77.506 r0 bottom
R4 "100k" 0805 84.317,75.244 r0 bottom
R5 "22K" 0805 84.317,86.073 r0 bottom
R6 "22K" 0805 84.317,79.589 r0 bottom
R7 "1k" 0805 66.731,82.483 r270 bottom
R8 "1k" 0805 53.444,80.078 r90 bottom
R9 "2.2/1206" 1206 66.719,72.768 r90 bottom
R10 "2.2/1206" 1206 66.719,65.555 r90 bottom
R11 "22K" 0805 92.428,78.769 r0 bottom
R12 "1k" 0805 120.85,101.543 r270 bottom
R13 "1k" 0805 115.674,74.026 r90 bottom
R14 "0" 0805 110.254,99.205 r0 bottom
R15 "DNI" 0805 112.548,97.066 r180 bottom
R16 "0" 0805 114.792,92.987 r90 bottom
R17 "DNI" 0805 112.548,95.042 r180 bottom
R28 "1k" 0805 138.453,147.991 r0 bottom
R29 "1k" 0805 140.783,154.544 r180 bottom
R31 "100" 0805 147.122,112.819 r180 bottom
R32 "10k" 0805 207.202,158.201 r0 bottom
R32a "5.6k" 0805 94.127,31.597 r90 bottom
R32b "1k" 0805 196.792,34.256 r0 bottom
R33 "10k" 0805 208.357,128.95 r180 bottom
R34 "10k" 0805 211.735,155.269 r180 bottom
R36 "10k" 0805 214.212,97.944 r180 bottom
R37 "10k" 0805 214.212,106.369 r180 bottom
R38 "10k" 0805 214.245,104.194 r180 bottom
R39 "10k" 0805 217.053,106.381 r0 bottom
R40 "10k" 0805 214.246,102.113 r180 bottom
R41 "10k" 0805 214.212,100.042 r180 bottom
R47 "1k" 0805 98.794,153.825 r90 bottom
R48 "100" 0805 136.264,126.544 r180 bottom
R49 "4.7k" 0805 136.264,124.488 r180 bottom
R50 "4.7k" 0805 134.359,114.467 r270 bottom
R51 "2.2k" 0805 130.922,112.169 r180 bottom
R52 "10" 1206 125.452,115.626 r270 bottom
R53 "4.7K" 0805 132.942,141.383 r270 bottom
R54 "4.7K" 0805 126.877,141.383 r270 bottom
R55 "4.7K" 0805 124.831,141.383 r270 bottom
R56 "100" 0805 32.462,53.762 r270 bottom
R57 "100" 0805 30.418,53.783 r270 bottom
R58 "100" 0805 28.292,53.733 r270 bottom
R59 "4.7K" 0805 30.412,57.21 r90 bottom
R60 "4.7K" 0805 28.286,57.183 r90 bottom
R61 "100k" 0805 41.069,66.353 r90 bottom
R62 "4.7K" 0805 43.392,66.681 r0 bottom
R63 "100K" 0805 41.019,72.642 r90 bottom
R64 "4.7K" 0805 43.394,72.8 r0 bottom
R65 "100" 0805 44.406,57.583 r270 bottom
R134 "1.6k" 0805 68.873,48.439 r0 bottom
R135 "1k" 0805 71.203,50.432 r180 bottom
R222 "1K" 0805 100.058,43.155 r90 bottom
R333 "4.7K" 0805 97.968,45.465 r270 bottom
R389 "330" 0805 161.597,55.964 r0 bottom
R444 "4.7K" 0805 91.906,33.908 r270 bottom
RFC1 "47uH" 0805 139.783,97.793 r0 bottom
RFC3 "47uH" 0805 170.337,110.722 r90 bottom value=100uH
RFC4 "22uH" 0805 134.822,133.594 r180 bottom
RFC5 "22uH" 0805 129.758,127.613 r180 bottom
RFC6 "47uH" 0805 39.081,54.008 r180 bottom
RFC102 "47uH" BIG_IND 60.094,56.398 r90 bottom locked
S0 "SSB(LSB/USB)" BUTTON_SMD2 43.01,65.024 r0 top locked
S1 "1(160m)" BUTTON_SMD2 61.315,65.024 r0 top locked
S2 "2(80m)" BUTTON_SMD2 79.615,65.024 r0 top locked
S3 "3(60m)" BUTTON_SMD2 97.915,65.024 r0 top locked
S4 "M(40m)" BUTTON_SMD2 116.215,65.024 r0 top locked
S5 "DSP" BUTTON_SMD2 134.515,65.024 r0 top locked
S6 "CW(KEYER)" BUTTON_SMD2 43.01,54.83 r0 top locked
S7 "4(30m)" BUTTON_SMD2 61.315,54.83 r0 top locked
S8 "5(20m)" BUTTON_SMD2 79.615,54.83 r0 top locked
S9 "6(17m)" BUTTON_SMD2 97.915,54.83 r0 top locked
S10 "S(15m)" BUTTON_SMD2 116.215,54.83 r0 top locked
S11 "STEP" BUTTON_SMD2 134.515,54.83 r0 top locked
S12 "AM(FM/DIGI)" BUTTON_SMD2 43.01,44.62 r0 top locked
S13 "7(12m)" BUTTON_SMD2 61.315,44.62 r0 top locked
S14 "8(10m)" BUTTON_SMD2 79.615,44.62 r0 top locked
S15 "9(6m)" BUTTON_SMD2 97.915,44.62 r0 top locked
S16 "ENTER" BUTTON_SMD2 116.215,39.5 r0 top locked
S17 "FILTER" BUTTON_SMD2 134.515,44.62 r0 top locked
S18 "FIX(CENTER)" BUTTON_SMD2 43.01,34.435 r0 top locked
S19 ".(4m)" BUTTON_SMD2 61.315,34.435 r0 top locked
S20 "0(LF)" BUTTON_SMD2 79.615,34.435 r0 top locked
S21 "C(MF)" BUTTON_SMD2 97.915,34.435 r0 top locked
S22 "SPLIT" BUTTON_SMD2 134.515,34.435 r0 top locked
S44 "REC" BUTTON_SMD3 28.5,103.375 r180 bottom locked
S77 "BT PAIR" BUTTON_SMD3 28.505,125.525 r180 bottom locked
SW45 "FAN(manual/auto)" SW3 30.469,149.207 r180 bottom locked
TS1 "TLZWLA" TLZWLA 222.025,92.8 r0 bottom locked
U1 "LM4853MM" SLAB-MSOP-10_N#1 85.4,82.85 r180 top
U2 "CS4245" QUAD48 130.352,91.495 r180 bottom
U3 "STM32H747BIT6" LQFP208-28X28X1.4 200.349,124.414 r90 bottom locked
U4 "AP22811A" SOT25-5 228.525,128.25 r180 bottom
U8 "RT9293B" SOT25-6 129.856,123.543 r0 bottom
U10 "FOX924B-25.000" 2SMX-3SMXB 33.169,41.144 r270 bottom
U11 "NCP51460" SOT-23 33.219,46.893 r0 bottom
U12 "Si5351A-A-GT" SLAB-MSOP-10_N#2 33.361,59.231 r90 bottom
U13 "74AC74DR" SO-14 30.193,75.196 r270 bottom
U14a "AP22811A" SOT25-5 121.125,45.85 r180 bottom
U15 "RFM98W" RFM96 147.125,52.825 r180 bottom locked
U19 "MT48LC4M32B2P-6A" MICT-TG-86_N 166.956,73.56 r270 bottom
U106 "LM2596S" TO-263-5 75.975,38.766 r180 bottom
U342 "KCX_BT" KCX_BT 158.416,52.148 r270 top locked
Y1 "ABS25-32.768KHZ-6-1-T" DSO-N4 199.849,115.387 r270 bottom locked

## Footprints (in the part's own frame and the unit in brackets; to place one, negate y for a bottom-side part, rotate by r counter-clockwise, add the part's x,y. Pads: shape width x height; smd on the part's side, far side on the other; paste and mask are expansions set on the pad)
2SMX-3SMXB [mm] "Quartz Crystal, SM; Body 6.0 x 3.5 mm (LxW)"
  rect 2.2x1.4 smd: 1(-2.4,-1.25) 2(2.4,-1.25) 3(2.4,1.25) 4(-2.4,1.25)
  silkscreen extent -3,-2.66 3,1.75
0805 [mil]
  rect 55x45 smd: 1(0.86,0.22) 2(90.86,0.22)
  silkscreen extent -37,-31 128,31
0805P [mil]
  rect 55x45 smd: 1(0.86,0.22) 2(90.86,0.22)
  silkscreen extent -37,-31 136,31
1206 [mil]
  rect 60x60 smd: 1(0.86,0.22) 2(135.86,0.22)
  silkscreen extent -49,-50 186,50
1206_Elec_Cap [mil]
  rect 60x60 smd: 1(0.86,0.22) 2(135.86,0.22)
  silkscreen extent -70,-70 186,50
1373866 [mm]
  rect 0.8x1.1 smd: A1(-5.715,2.75) A2(-4.445,2.75) A3(-3.175,2.75) A4(-1.905,2.75) A5(-0.635,2.75) A6(0.635,2.75) A7(1.905,2.75) A8(3.175,2.75) A9(4.445,2.75) A10(5.715,2.75) A11(-5.715,-2.75) A12(-4.445,-2.75) A13(-3.175,-2.75) A14(-1.905,-2.75) A15(-0.635,-2.75) A16(0.635,-2.75) A17(1.905,-2.75) A18(3.175,-2.75) A19(4.445,-2.75) A20(5.715,-2.75)
  round 0.8 hole 1.6 unplated: MH1(-7.925,0) MH2(7.925,0)
  rect 1.2x2.75 smd: MP1(-8.225,2.425) MP2(8.225,2.425) MP3(-8.225,-2.425) MP4(8.225,-2.425)
  silkscreen extent -7.2,-2.1 7.2,4.1
BIG_IND [mm] "power inductor large"
  rect 3x6 smd: 1(-5.5,0.006) 2(5.5,0)
  silkscreen extent -6.25,-6.25 6.25,6.25
BUTTON_SMD2 [mm]
  rect 2x2 smd: 1(1,5) 2(1,1) 3(9,5) 4(9,1)
  silkscreen extent -0.25,-0.25 10.26,6.27
BUTTON_SMD3 [mm]
  rect 2x2 smd: 1(1.651,2.921) 2(-1.651,2.921) 3(1.651,-2.921) 4(-1.651,-2.921)
  round 0 hole 0.65 unplated mask+0.05: NPTH1(-1.905,0) NPTH1(1.905,0)
  silkscreen extent -3.05,-4.32 2.92,4.32
CAP_ALUM_Pro [mm]
  rect 3x1 smd: 1(-3,0) 2(3,0)
  silkscreen extent -4.32,-3.3 3.33,3.3
DO214 [mm]
  rect 1.96x3.39 smd: 1(0.012,0.006) 2(6.25,0)
  silkscreen extent -1.5,-2.25 7.85,2.25
DSO-N4 [mm] "Crystal, SM; 4 Leads; Body 8 x 3.8 x 2.5 mm (LxWxH)"
  rect 1.3x1.9 smd: 1(-2.75,-1.6) 2(2.75,-1.6) 3(2.75,1.6) 4(-2.75,1.6)
  silkscreen extent -4,-1.9 4.87,1.9
KCX_BT [mm]
  rect 0.813x2 smd: 1(-6.352,0.034) 2(-5.082,0.034) 3(-3.812,0.034) 4(-2.542,0.034) 5(-1.272,0.034) 6(-0.002,0.034) 7(1.268,0.034) 8(2.538,0.034) 9(3.808,0.034) 10(5.078,0.034) 11(6.348,0.034)
  Top Layer keep-out lines w0.127: 8.255,17.776 8.255,23.869 -8.255,23.875 -8.255,17.782 8.255,17.776
  Bottom Layer keep-out lines w0.127: 8.255,17.776 8.255,23.869 -8.255,23.875 -8.255,17.782 8.255,17.776
  Keep-Out Layer region: -13.335,24.765
  silkscreen extent -7.62,-1.27 7.62,23.49
lora_ant_pad [mm]
  oval 5x4 smd: 1(0.022,0.006)
  silkscreen extent -2.8,-2.8 2.99,2.8
LQFP208-28X28X1.4 [mm]
  rect 1.2x0.3 smd: 1(0,0)
  oval 1.2x0.3 smd: 2(0,-0.5) 3(0,-1) 4(0,-1.5) 5(0,-2) 6(0,-2.5) 7(0,-3) 8(0,-3.5) 9(0,-4) 10(0,-4.5) 11(0,-5) 12(0,-5.5) 13(0,-6) 14(0,-6.5) 15(0,-7) 16(0,-7.5) 17(0,-8) 18(0,-8.5) 19(0,-9) 20(0,-9.5) 21(0,-10) 22(0,-10.5) 23(0,-11) 24(0,-11.5) 25(0,-12) 26(0,-12.5) 27(0,-13) 28(0,-13.5) 29(0,-14) 30(0,-14.5) 31(0,-15) 32(0,-15.5) 33(0,-16) 34(0,-16.5) 35(0,-17) 36(0,-17.5) 37(0,-18) 38(0,-18.5) 39(0,-19) 40(0,-19.5) 41(0,-20) 42(0,-20.5) 43(0,-21) 44(0,-21.5) 45(0,-22) 46(0,-22.5) 47(0,-23) 48(0,-23.5) 49(0,-24) 50(0,-24.5) 51(0,-25) 52(0,-25.5) 105(29.5,-25.5) 106(29.5,-25) 107(29.5,-24.5) 108(29.5,-24) 109(29.5,-23.5) 110(29.5,-23) 111(29.5,-22.5) 112(29.5,-22) 113(29.5,-21.5) 114(29.5,-21) 115(29.5,-20.5) 116(29.5,-20) 117(29.5,-19.5) 118(29.5,-19) 119(29.5,-18.5) 120(29.5,-18) 121(29.5,-17.5) 122(29.5,-17) 123(29.5,-16.5) 124(29.5,-16) 125(29.5,-15.5) 126(29.5,-15) 127(29.5,-14.5) 128(29.5,-14) 129(29.5,-13.5) 130(29.5,-13) 131(29.5,-12.5) 132(29.5,-12) 133(29.5,-11.5) 134(29.5,-11) 135(29.5,-10.5) 136(29.5,-10) 137(29.5,-9.5) 138(29.5,-9) 139(29.5,-8.5) 140(29.5,-8) 141(29.5,-7.5) 142(29.5,-7) 143(29.5,-6.5) 144(29.5,-6) 145(29.5,-5.5) 146(29.5,-5) 147(29.5,-4.5) 148(29.5,-4) 149(29.5,-3.5) 150(29.5,-3) 151(29.5,-2.5) 152(29.5,-2) 153(29.5,-1.5) 154(29.5,-1) 155(29.5,-0.5) 156(29.5,0)
  oval 0.3x1.2 smd: 53(2,-27.5) 54(2.5,-27.5) 55(3,-27.5) 56(3.5,-27.5) 57(4,-27.5) 58(4.5,-27.5) 59(5,-27.5) 60(5.5,-27.5) 61(6,-27.5) 62(6.5,-27.5) 63(7,-27.5) 64(7.5,-27.5) 65(8,-27.5) 66(8.5,-27.5) 67(9,-27.5) 68(9.5,-27.5) 69(10,-27.5) 70(10.5,-27.5) 71(11,-27.5) 72(11.5,-27.5) 73(12,-27.5) 74(12.5,-27.5) 75(13,-27.5) 76(13.5,-27.5) 77(14,-27.5) 78(14.5,-27.5) 79(15,-27.5) 80(15.5,-27.5) 81(16,-27.5) 82(16.5,-27.5) 83(17,-27.5) 84(17.5,-27.5) 85(18,-27.5) 86(18.5,-27.5) 87(19,-27.5) 88(19.5,-27.5) 89(20,-27.5) 90(20.5,-27.5) 91(21,-27.5) 92(21.5,-27.5) 93(22,-27.5) 94(22.5,-27.5) 95(23,-27.5) 96(23.5,-27.5) 97(24,-27.5) 98(24.5,-27.5) 99(25,-27.5) 100(25.5,-27.5) 101(26,-27.5) 102(26.5,-27.5) 103(27,-27.5) 104(27.5,-27.5) 157(27.5,2) 158(27,2) 159(26.5,2) 160(26,2) 161(25.5,2) 162(25,2) 163(24.5,2) 164(24,2) 165(23.5,2) 166(23,2) 167(22.5,2) 168(22,2) 169(21.5,2) 170(21,2) 171(20.5,2) 172(20,2) 173(19.5,2) 174(19,2) 175(18.5,2) 176(18,2) 177(17.5,2) 178(17,2) 179(16.5,2) 180(16,2) 181(15.5,2) 182(15,2) 183(14.5,2) 184(14,2) 185(13.5,2) 186(13,2) 187(12.5,2) 188(12,2) 189(11.5,2) 190(11,2) 191(10.5,2) 192(10,2) 193(9.5,2) 194(9,2) 195(8.5,2) 196(8,2) 197(7.5,2) 198(7,2) 199(6.5,2) 200(6,2) 201(5.5,2) 202(5,2) 203(4.5,2) 204(4,2) 205(3.5,2) 206(3,2) 207(2.5,2) 208(2,2)
  silkscreen extent -0.4,-27.5 29.5,2.1
MHDR1X2 [mm] "Connector; Header; 2 Position"
  rect 1x1 hole 0.6: 1(0,0)
  round 1 hole 0.6: 2(1.27,0)
  silkscreen extent -0.9,-0.9 2.17,0.9
MICT-TG-86_N [mm] "SOP, 86-Leads, Body 22.22x10.16mm, Pitch 0.5mm, IPC Medium Density"
  oval 1.6x0.3 smd: 1(-5.5,10.5) 2(-5.5,10) 3(-5.5,9.5) 4(-5.5,9) 5(-5.5,8.5) 6(-5.5,8) 7(-5.5,7.5) 8(-5.5,7) 9(-5.5,6.5) 10(-5.5,6) 11(-5.5,5.5) 12(-5.5,5) 13(-5.5,4.5) 14(-5.5,4) 15(-5.5,3.5) 16(-5.5,3) 17(-5.5,2.5) 18(-5.5,2) 19(-5.5,1.5) 20(-5.5,1) 21(-5.5,0.5) 22(-5.5,0) 23(-5.5,-0.5) 24(-5.5,-1) 25(-5.5,-1.5) 26(-5.5,-2) 27(-5.5,-2.5) 28(-5.5,-3) 29(-5.5,-3.5) 30(-5.5,-4) 31(-5.5,-4.5) 32(-5.5,-5) 33(-5.5,-5.5) 34(-5.5,-6) 35(-5.5,-6.5) 36(-5.5,-7) 37(-5.5,-7.5) 38(-5.5,-8) 39(-5.5,-8.5) 40(-5.5,-9) 41(-5.5,-9.5) 42(-5.5,-10) 43(-5.5,-10.5) 44(5.5,-10.5) 45(5.5,-10) 46(5.5,-9.5) 47(5.5,-9) 48(5.5,-8.5) 49(5.5,-8) 50(5.5,-7.5) 51(5.5,-7) 52(5.5,-6.5) 53(5.5,-6) 54(5.5,-5.5) 55(5.5,-5) 56(5.5,-4.5) 57(5.5,-4) 58(5.5,-3.5) 59(5.5,-3) 60(5.5,-2.5) 61(5.5,-2) 62(5.5,-1.5) 63(5.5,-1) 64(5.5,-0.5) 65(5.5,0) 66(5.5,0.5) 67(5.5,1) 68(5.5,1.5) 69(5.5,2) 70(5.5,2.5) 71(5.5,3) 72(5.5,3.5) 73(5.5,4) 74(5.5,4.5) 75(5.5,5) 76(5.5,5.5) 77(5.5,6) 78(5.5,6.5) 79(5.5,7) 80(5.5,7.5) 81(5.5,8) 82(5.5,8.5) 83(5.5,9) 84(5.5,9.5) 85(5.5,10) 86(5.5,10.5)
  silkscreen extent -5.62,-11.18 4.32,11.32
MOLX-52746-2071 [mm] "FPC Connector, 20-Leads, Right Angle, Pitch 0.5 mm, Mated Height 2.0 mm, SMT"
  rect 0.3x1 smd: 1(-4.75,0.924) 2(-4.25,0.924) 3(-3.75,0.924) 4(-3.25,0.924) 5(-2.75,0.924) 6(-2.25,0.924) 7(-1.75,0.924) 8(-1.25,0.924) 9(-0.75,0.924) 10(-0.25,0.924) 11(0.25,0.924) 12(0.75,0.924) 13(1.25,0.924) 14(1.75,0.924) 15(2.25,0.924) 16(2.75,0.924) 17(3.25,0.924) 18(3.75,0.924) 19(4.25,0.924) 20(4.75,0.924)
  rect 1x1 smd: MP1(-7.134,-0.824) MP2(7.134,-0.824)
  Top Layer region: -8.4,0.424 -6,0.424 -6,-2.626 -6,-2.626 -7.3,-2.626 -7.3,-1.777 -7.3,-1.776 -8.4,-1.776
  Top Layer region: 6,0.424 8.4,0.424 8.4,-1.776 8.4,-1.777 7.3,-1.777 7.3,-2.626 6,-2.626 6,0.424
  silkscreen extent -8.05,-5.68 8.05,1.99
MOLX-501461-0891 [mm] "FPC Connector, 8-Leads, Right Angle, Pitch 0.5 mm, Mated Height 0.8 mm, SMT"
  rect 0.3x1.41 smd: 1(-1.75,0.778) 2(-1.25,0.778) 3(-0.75,0.778) 4(-0.25,0.778) 5(0.25,0.778) 6(0.75,0.778) 7(1.25,0.778) 8(1.75,0.778)
  rect 3.5x2 smd: MP1(-4.2,-0.699) MP2(4.2,-0.684)
  silkscreen extent -5.08,-3.56 5.08,1.4
PJS008-2003-1 [mm]
  rect 1.6x0.8 smd paste+0 mask+0.05: 1(-15.6,-2.525) 2(-15.6,-1.425) 3(-15.6,-0.325) 4(-15.6,0.775) 5(-15.6,1.875) 6(-15.6,2.975) 7(-15.6,4.075) 8(-15.6,5.175) 9(-15.6,6.325)
  rect 1.4x1.95 smd paste+0 mask+0.05: 10(-5.4,7.225)
  rect 3.5x1.5 smd paste+0 mask+0.05: 11(-2.45,7.45)
  rect 3.5x1.4 smd paste+0 mask+0.05: 12(-2.45,-7.5)
  rect 3.5x1.6 smd paste+0 mask+0.05: 13(-13.45,-7.4)
  rect 3.1x1.2 smd paste+0 mask+0.05: 14(-13.95,7.6)
  round 0 hole 0.65 unplated mask+0.05: NPTH1(-9.8,-4)
  round 0 hole 0.7 unplated mask+0.05: NPTH2(-9.8,3.55)
  silkscreen extent -15.32,-7.25 -0.28,7.25, body extent -15.04,-7.18 -0.84,7.42, height 2
QUAD48 [mm]
  rect 1.5x0.3 smd: 1(0.01,-0.002)
  oval 1.5x0.3 smd: 2(0.01,-0.502) 3(0.01,-1.002) 4(0.01,-1.502) 5(0.01,-2.002) 6(0.01,-2.502) 7(0.01,-3.002) 8(0.01,-3.502) 9(0.01,-4.002) 10(0.01,-4.502) 11(0.01,-5.002) 12(0.01,-5.502) 25(9.21,-5.502) 26(9.21,-5.002) 27(9.21,-4.502) 28(9.21,-4.002) 29(9.21,-3.502) 30(9.21,-3.002) 31(9.21,-2.502) 32(9.21,-2.002) 33(9.21,-1.502) 34(9.21,-1.002) 35(9.21,-0.502) 36(9.21,-0.002)
  oval 0.3x1.5 smd: 13(1.86,-7.352) 14(2.36,-7.352) 15(2.86,-7.352) 16(3.36,-7.352) 17(3.86,-7.352) 18(4.36,-7.352) 19(4.86,-7.352) 20(5.36,-7.352) 21(5.86,-7.352) 22(6.36,-7.352) 23(6.86,-7.352) 24(7.36,-7.352) 37(7.36,1.848) 38(6.86,1.848) 39(6.36,1.848) 40(5.86,1.848) 41(5.36,1.848) 42(4.86,1.848) 43(4.36,1.848) 44(3.86,1.848) 45(3.36,1.848) 46(2.86,1.848) 47(2.36,1.848) 48(1.86,1.848)
  silkscreen extent 0.01,-7.34 9.2,1.85
RFM96 [mm]
  rect 3x1 smd: 1(0,0) 2(0,-2) 3(0,-4) 4(0,-6) 5(0,-8) 6(0,-10) 7(0,-12) 8(0,-14) 9(15.037,-14) 10(15.037,-12) 11(15.037,-10) 12(15.037,-8) 13(15.037,-6) 14(15.037,-4) 15(15.037,-2) 16(15.037,0)
  silkscreen extent -0.76,-15.52 15.75,1.52
SB_0603 [mil] "Jumper"
  rect 32x40 smd: 1(33.75,0) 2(-33.75,0)
  Top Layer region: -26.25,0 -16.25,0 3.75,-20 -26.25,-20
  Top Layer region: -26.25,0 -16.25,0 3.75,20 -26.25,20
  Top Layer region: 23.75,20 13.75,20 -6.25,0 13.75,-20 23.75,-20
  Top Layer lines w6: -33.75,0 23.75,0
SB_0603_NO [mil] "Jumper"
  rect 32x40 smd: 1(33.75,0) 2(-33.75,0)
  Top Layer region: -26.25,0 -16.25,0 3.75,-20 -26.25,-20
  Top Layer region: -26.25,0 -16.25,0 3.75,20 -26.25,20
  Top Layer region: 23.75,20 13.75,20 -6.25,0 13.75,-20 23.75,-20
SLAB-MSOP-10_N#1 [mm] "SOP, 10-Leads, Body 3x3mm, Pitch 0.5mm, IPC Medium Density"
  oval 1.65x0.25 smd far side: 1(-2.025,-1) 2(-2.025,-0.5) 3(-2.025,0) 4(-2.025,0.5) 5(-2.025,1) 6(2.025,1) 7(2.025,0.5) 8(2.025,0) 9(2.025,-0.5) 10(2.025,-1)
SLAB-MSOP-10_N#2 [mm] "SOP, 10-Leads, Body 3x3mm, Pitch 0.5mm, IPC Medium Density"
  oval 1.65x0.25 smd: 1(-2.025,1) 2(-2.025,0.5) 3(-2.025,0) 4(-2.025,-0.5) 5(-2.025,-1) 6(2.025,-1) 8(2.025,0) 9(2.025,0.5) 10(2.025,1)
  oval 1.85x0.25 smd: 7(1.925,-0.5)
  silkscreen extent -2.15,-1.5 0.8,1.85
SO-14 [mil]
  oval 80x24 smd: 1(0,0) 2(0,-50) 3(0,-100) 4(0,-150) 5(0,-200) 6(0,-250) 7(0,-300) 8(220,-300) 9(220,-250) 10(220,-200) 11(220,-150) 12(220,-100) 13(220,-50) 14(220,0)
  silkscreen extent 59,-335 161,38
SOD87 [mil]
  rect 50x70 smd: 1(0.46,0.23) 2(145.46,0.23)
  silkscreen extent -45,-55 201,55
SOT25-5 [mm] "5 lead package"
  rect 1.05x0.6 smd: 1(-1.35,0.95) 2(-1.35,0) 3(-1.35,-0.95) 4(1.35,-0.95) 5(1.35,0.95)
  silkscreen extent -1.75,-1.75 1.25,1.87
SOT25-6 [mm] "6 lead package"
  rect 1.05x0.6 smd: 1(-1.35,0.95) 2(-1.35,0) 3(-1.35,-0.95) 4(1.35,-0.95) 5(1.35,0) 6(1.35,0.95)
  silkscreen extent -1.75,-1.75 1.25,1.87
SOT-23 [mm]
  rect 0.8x0.9 smd: 1(-0.98,-1) 2(0.98,-1) 3(0,1)
  silkscreen extent -1.95,-1.62 1.5,0.7, body extent -1.52,-0.7 1.52,0.7, height 1.11
SOT-23-Pro [mil]
  rect 36x36 smd: 1(0.39,0.34) 2(75.39,0.34)
  rect 36x50 smd: 3(38.39,80.34)
  silkscreen extent -75,-40 150,125
SW3 [mm] "Three poe switch"
  rect 2.5x1.2 smd: 1(-0.381,2.032) 2(-0.381,0) 3(-0.381,-2.032)
  Keep-Out Layer board cut-out: 5.08,4.445 1.25,4.445 1.25,-4.445 5.08,-4.445
  Keep-Out Layer lines w0.127: 5.08,-4.445 5.08,4.445 1.27,4.445 1.27,-4.445 5.08,-4.445
  silkscreen extent -1.65,-4.7 4.7,4.7
TLZWLA [mm]
  rect 1.4x1.95 smd paste+0 mask+0.05: a(0,5.08) b(-4.445,2.54) c(-4.445,0) d(-4.445,-2.54) e(0,-5.08)
  round 0 hole 0.65 unplated mask+0.05: NPTH1(-1.27,-2.54)
  round 0 hole 0.7 unplated mask+0.05: NPTH2(-1.27,2.54)
  silkscreen extent -5.71,-6.35 3.26,6.35
TO-263-5 [mil]
  rect 118.11x42 smd: 1(251,-133.46) 2(251,-66.46) 3(251,0) 4(251,67.54) 5(251,134.54)
  rect 354.33x401.57 smd: 3(-137.8,0)
  silkscreen extent -335,-217 315,217
USB_OUT_A [mil]
  round 55 hole 30: 1(480.7,120.96) 2(480.7,220.96) 3(480.7,300.96) 4(480.7,400.96)
  round 130 hole 85: 5(410.7,520.96) 6(410.7,0.96)
  silkscreen extent 1,1 561,521
USBC_24P [mm]
  rect 0.3x0.85 smd: A1(-2.75,0.5) A2(-2.25,0.5) A3(-1.75,0.5) A4(-1.25,0.5) A5(-0.75,0.5) A6(-0.25,0.5) A7(0.25,0.5) A8(0.75,0.5) A9(1.25,0.5) A10(1.75,0.5) A11(2.25,0.5) A12(2.75,0.5)
  round 0.5 hole 0.4: B1(2.8,-0.733) B2(2.4,-1.355) B3(1.6,-1.355) B4(1.2,-0.733) B5(0.8,-1.355) B6(0.4,-0.733) B7(-0.4,-0.733) B8(-0.8,-1.355) B9(-1.2,-0.733) B10(-1.6,-1.355) B11(-2.4,-1.355) B12(-2.8,-0.733)
  round 0.3 hole 0.65 unplated: MH1(-3.669,-0.001) MH2(3.679,0.001)
  oval 0.838x1.2 hole 0.7: MH3(-4.13,-1.25) MH4(4.13,-1.25) MH5(4.49,-5.64) MH6(-4.49,-5.64)
  silkscreen extent -5.15,-6.54 5.13,1.91
YuanQi4mm [mm] "Board To Board 1.27mm pitch 20pin 4mm stack"
  rect 0.74x2 smd: A1(-5.715,1.905) A2(-4.445,1.905) A3(-3.175,1.905) A4(-1.905,1.905) A5(-0.635,1.905) A6(0.635,1.905) A7(1.905,1.905) A8(3.175,1.905) A9(4.445,1.905) A10(5.715,1.905) A11(-5.715,-1.905) A12(-4.445,-1.905) A13(-3.175,-1.905) A14(-1.905,-1.905) A15(-0.635,-1.905) A16(0.635,-1.905) A17(1.905,-1.905) A18(3.175,-1.905) A19(4.445,-1.905) A20(5.715,-1.905)
  silkscreen extent -7.62,-3.18 7.62,3.18